# Altium PCB Relay.PcbDoc
Units mil, origin at the board's own origin, x right, y up, seen from the top; angles counter-clockwise.
Board outline 6702.94 x 3280.03 mil, 2 copper layers (Top Layer, Bottom Layer); 131 components, 162 nets, 454 pads, 0 vias.
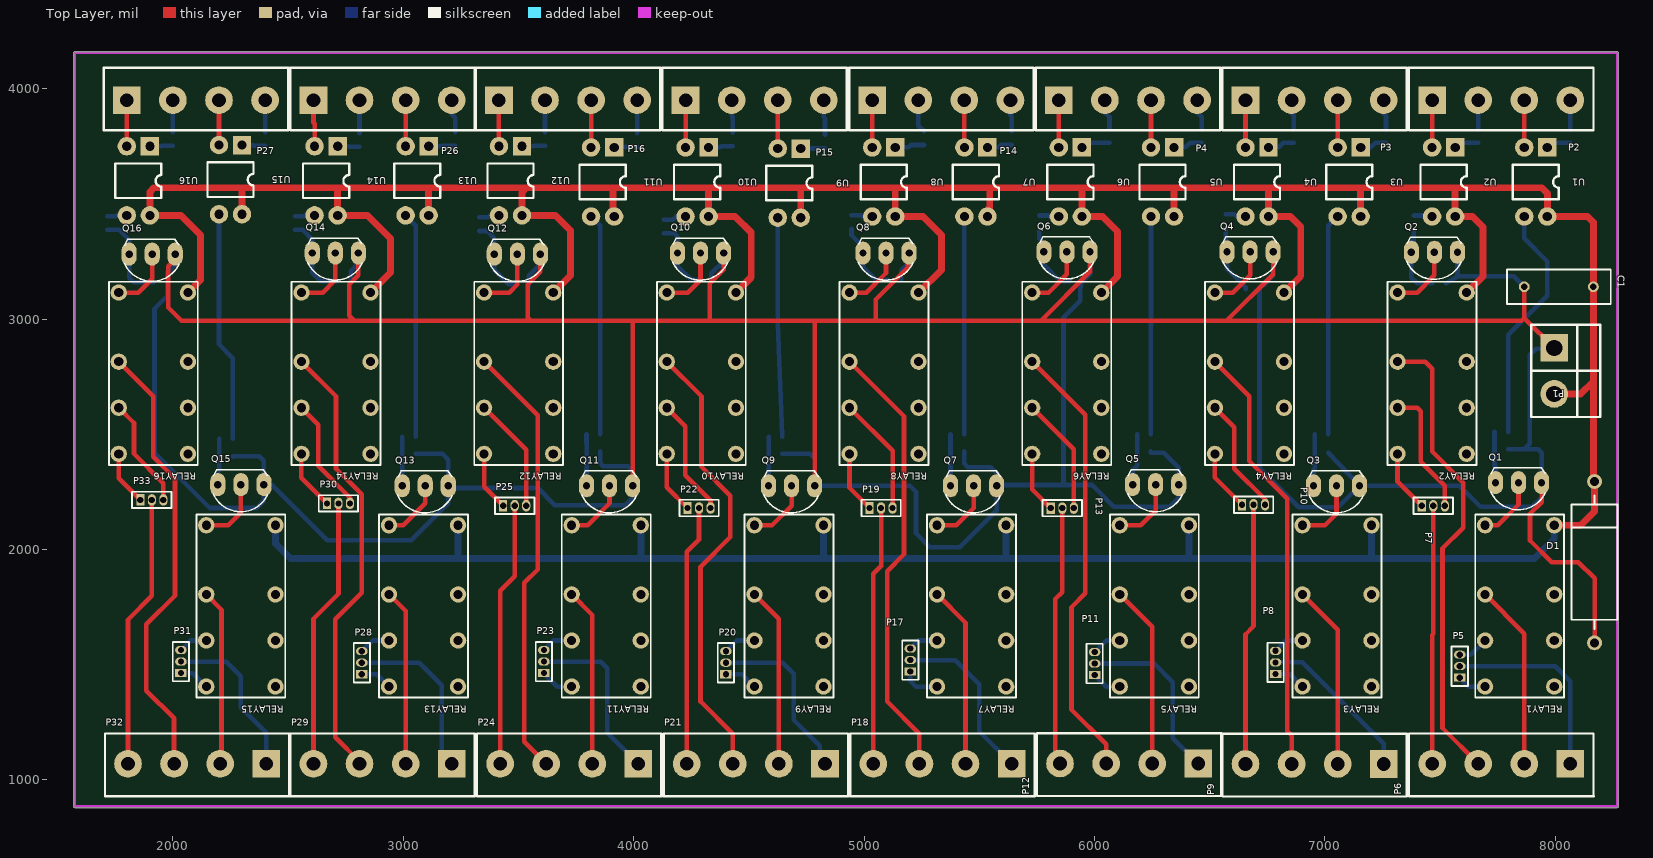
[diagram p0: Top Layer view]
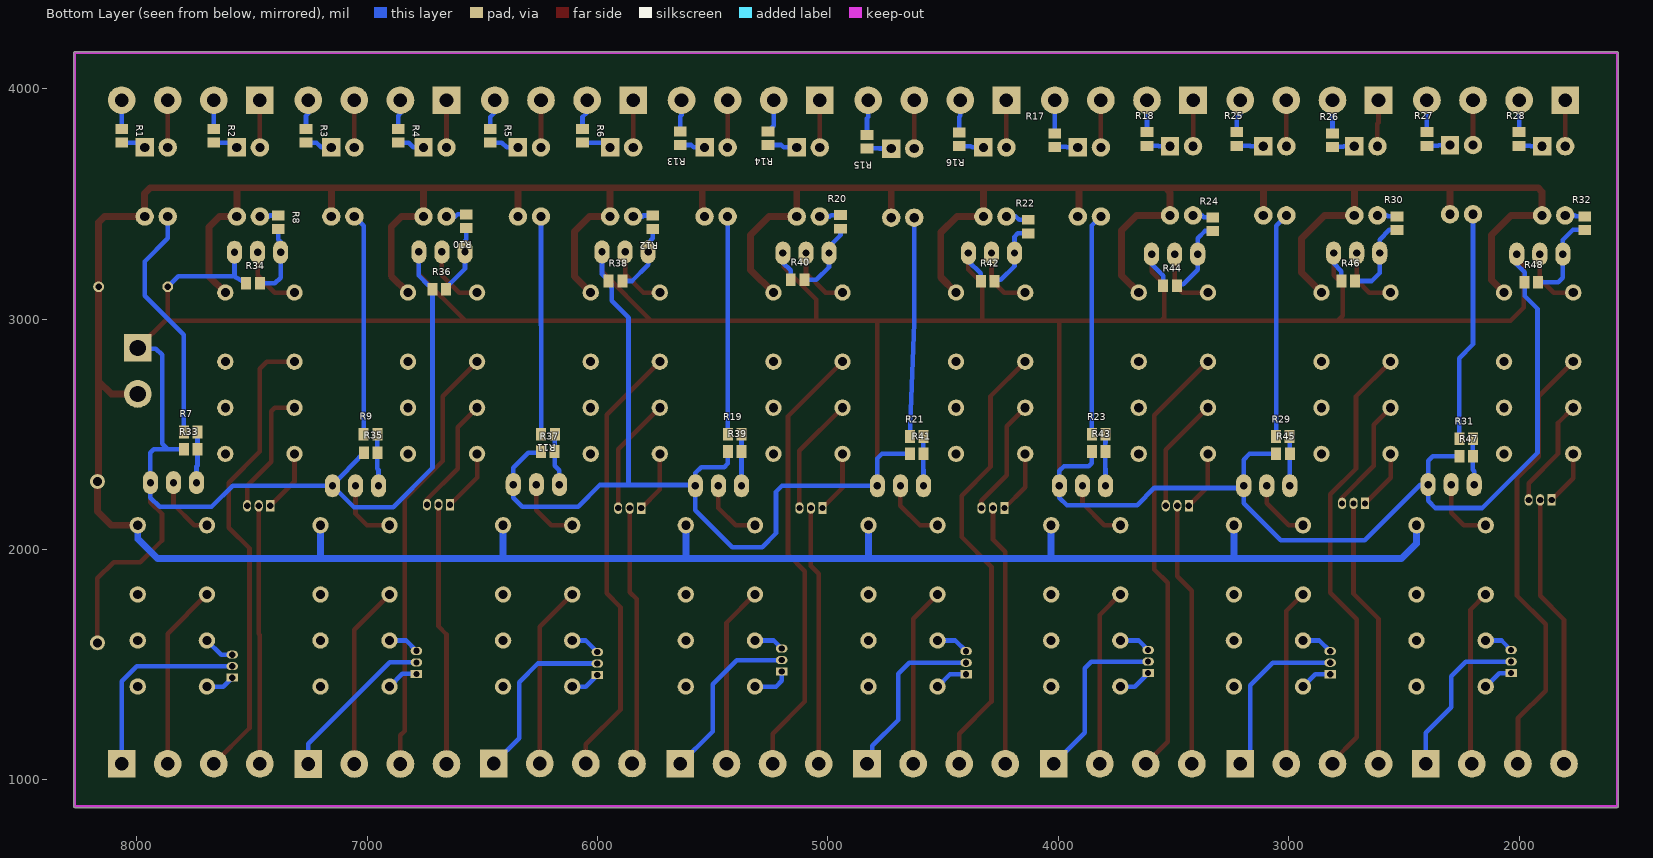
[diagram p1: Bottom Layer view, seen from below]

## Layer stack, top to bottom
Top Solder: solder mask 0.4, Solder Resist, Dk 3.5
Top Layer: signal copper 1.4
Dielectric 1: dielectric 12.6, FR-4, Dk 4.8
Bottom Layer: signal copper 1.4
Bottom Solder: solder mask 0.4, Solder Resist, Dk 3.5

## Board outline
1569.92,886.14 cw(c1574.8,887.28) 1569.79,887.28 1569.79,4155 cw(c1574.8,4155) 1574.8,4160.02 8267.72,4160.02 cw(c8267.72,4155) 8272.73,4155 8272.73,887.28 cw(c8267.72,887.28) 8272.6,886.14 cw(c8267.72,885) 8272.73,885 cw(c8267.72,885) 8267.72,879.99 1574.8,879.99 cw(c1574.8,885)

## Design rules (kind name [scope] priority, off if disabled: settings)
Clearance [All] p1: gap=15 ignorepadtopadclearanceinfootprint=FALSE
PolygonConnect [All] p1: connectstyle=Relief reliefconductorwidth=10 reliefentries=4 polygonreliefangle="90 Angle" airgapwidth=10
RoutingVias [All] p1: holewidth=28 width=50 viastyle="Through Hole" minholewidth=28 minwidth=50 maxholewidth=28 maxwidth=50
SolderMaskExpansion [All] p1: expansion=4
Width [All] p1: maxlimit=50 minlimit=10 preferedwidth=20
30 further rules are at their usual default settings.

## Components (designator, comment, footprint, x,y, rotation, side; value= is the part's Value field where it differs from the comment)
C1 "Cap" RAD-0.3 8015,3140 r0 top value=100pF
D1 "D Zener" DIODE-0.7 8170,1945 r90 top
P1 "Header 2" CON2 7995,2875 r270 top
P2 "Header 4" CON4 7465,3950 r0 top
P3 "Header 4" CON4 6655,3950 r0 top
P4 "Header 4" CON4 5845,3950 r0 top
P5 "MHDR1X3" MHDR1X3 7585,1443.5 r90 top
P6 "Header 4" CON4 8065,1070 r180 top
P7 "MHDR1X3" MHDR1X3 7420,2189.5 r0 top
P8 "MHDR1X3" MHDR1X3 6785.63,1460 r90 top
P9 "Header 4" CON4 7255,1069 r180 top
P10 "MHDR1X3" MHDR1X3 6640,2194.37 r0 top
P11 "MHDR1X3" MHDR1X3 6000.5,1455 r90 top
P12 "Header 4" CON4 6450,1071 r180 top
P13 "MHDR1X3" MHDR1X3 5810,2179.5 r0 top
P14 "Header 4" CON4 5035,3950 r0 top
P15 "Header 4" CON4 4225,3950 r0 top
P16 "Header 4" CON4 3415,3950 r0 top
P17 "MHDR1X3" MHDR1X3 5200.5,1470 r90 top
P18 "Header 4" CON4 5640,1070 r180 top
P19 "MHDR1X3" MHDR1X3 5023.5,2180 r0 top
P20 "MHDR1X3" MHDR1X3 4400,1458.5 r90 top
P21 "Header 4" CON4 4830,1070 r180 top
P22 "MHDR1X3" MHDR1X3 4233.5,2180 r0 top
P23 "MHDR1X3" MHDR1X3 3610,1463.5 r90 top
P24 "Header 4" CON4 4020,1070 r180 top
P25 "MHDR1X3" MHDR1X3 3433.5,2190 r0 top
P26 "Header 4" CON4 2610,3950 r0 top
P27 "Header 4" CON4 1800,3950 r0 top
P28 "MHDR1X3" MHDR1X3 2820,1458.5 r90 top
P29 "Header 4" CON4 3210,1070 r180 top
P30 "MHDR1X3" MHDR1X3 2668.5,2200 r0 top
P31 "MHDR1X3" MHDR1X3 2035,1463.5 r90 top
P32 "Header 4" CON4 2405,1070 r180 top
P33 "MHDR1X3" MHDR1X3 1858.5,2215 r0 top
Q1 "2N3904" QTO-92 7840,2290 r180 top
Q2 "2N3904" QTO-92 7475,3290 r180 top
Q3 "2N3904" QTO-92 7050,2276.5 r180 top
Q4 "2N3904" QTO-92 6675,3291.5 r180 top
Q5 "2N3904" QTO-92 6265,2281.5 r180 top
Q6 "2N3904" QTO-92 5880,3291.5 r180 top
Q7 "2N3904" QTO-92 5475,2276.5 r180 top
Q8 "2N3904" QTO-92 5095,3286.5 r180 top
Q9 "2N3904" QTO-92 4685,2276.5 r180 top
Q10 "2N3904" QTO-92 4290,3286.5 r180 top
Q11 "2N3904" QTO-92 3895,2276.5 r180 top
Q12 "2N3904" QTO-92 3495,3281.5 r180 top
Q13 "2N3904" QTO-92 3095,2276.5 r180 top
Q14 "2N3904" QTO-92 2705,3286.5 r180 top
Q15 "2N3904" QTO-92 2295,2281.5 r180 top
Q16 "2N3904" QTO-92 1910,3281.5 r180 top
R1 "Res3" C0805 8065,3795 r270 bottom value=1K
R2 "Res3" C0805 7665,3795 r270 bottom value=1K
R3 "Res3" C0805 7265,3795 r270 bottom value=1K
R4 "Res3" C0805 6865,3795 r270 bottom value=1K
R5 "Res3" C0805 6465,3795 r270 bottom value=1K
R6 "Res3" C0805 6065,3795 r270 bottom value=1K
R7 "Res3" C0805 7765.47,2510 r180 bottom value=1K
R8 "Res3" C0805 7385,3420 r270 bottom value=1K
R9 "Res3" C0805 6985,2500 r180 bottom value=1K
R10 "Res3" C0805 6570,3425 r270 bottom value=1K
R11 "Res3" C0805 6214.53,2500 r180 bottom value=1K
R12 "Res3" C0805 5760,3420 r270 bottom value=1K
R13 "Res3" C0805 5640,3785 r270 bottom value=1K
R14 "Res3" C0805 5260,3785 r270 bottom value=1K
R15 "Res3" C0805 4830,3770 r270 bottom value=1K
R16 "Res3" C0805 4430,3780 r270 bottom value=1K
R17 "Res3" C0805 4015,3776.5 r270 bottom value=1K
R18 "Res3" C0805 3615,3781.5 r270 bottom value=1K
R19 "Res3" C0805 5404.53,2500 r180 bottom value=1K
R20 "Res3" C0805 4945,3421.5 r270 bottom value=1K
R21 "Res3" C0805 4615,2490 r180 bottom value=1K
R22 "Res3" C0805 4130,3401.5 r270 bottom value=1K
R23 "Res3" C0805 3824.53,2500 r180 bottom value=1K
R24 "Res3" C0805 3330,3411.5 r270 bottom value=1K
R25 "Res3" C0805 3225,3781.5 r270 bottom value=1K
R26 "Res3" C0805 2810,3776.5 r270 bottom value=1K
R27 "Res3" C0805 2400,3781.5 r270 bottom value=1K
R28 "Res3" C0805 2000,3781.5 r270 bottom value=1K
R29 "Res3" C0805 3025,2490 r180 bottom value=1K
R30 "Res3" C0805 2530,3416.5 r270 bottom value=1K
R31 "Res3" C0805 2230,2480 r180 bottom value=1K
R32 "Res3" C0805 1715,3416.5 r270 bottom value=1K
R33 "Res3" C0805 7765.47,2435 r180 bottom value=1K
R34 "Res3" C0805 7495,3155 r180 bottom value=1K
R35 "Res3" C0805 6984.53,2420 r180 bottom value=1K
R36 "Res3" C0805 6686.5,3130 r180 bottom value=1K
R37 "Res3" C0805 6215,2425 r180 bottom value=1K
R38 "Res3" C0805 5921.5,3165 r180 bottom value=1K
R39 "Res3" C0805 5404.53,2425 r180 bottom value=1K
R40 "Res3" C0805 5131.5,3170 r180 bottom value=1K
R41 "Res3" C0805 4615,2415 r180 bottom value=1K
R42 "Res3" C0805 4306.72,3164.43 r180 bottom value=1K
R43 "Res3" C0805 3825,2425 r180 bottom value=1K
R44 "Res3" C0805 3515,3145 r180 bottom value=1K
R45 "Res3" C0805 3024.53,2415 r180 bottom value=1K
R46 "Res3" C0805 2741.5,3165 r180 bottom value=1K
R47 "Res3" C0805 2230,2405 r180 bottom value=1K
R48 "Res3" C0805 1946.5,3160 r180 bottom value=1K
RELAY1 "RY12W-K" RY-Series 7695,2105 r270 top
RELAY2 "RY12W-K" RY-Series 7315,3115 r270 top
RELAY3 "RY12W-K" RY-Series 6902.14,2105 r270 top
RELAY4 "RY12W-K" RY-Series 6522.14,3115 r270 top
RELAY5 "RY12W-K" RY-Series 6109.29,2105 r270 top
RELAY6 "RY12W-K" RY-Series 5729.29,3115 r270 top
RELAY7 "RY12W-K" RY-Series 5316.43,2105 r270 top
RELAY8 "RY12W-K" RY-Series 4936.43,3115 r270 top
RELAY9 "RY12W-K" RY-Series 4523.57,2105 r270 top
RELAY10 "RY12W-K" RY-Series 4143.57,3115 r270 top
RELAY11 "RY12W-K" RY-Series 3730.71,2105 r270 top
RELAY12 "RY12W-K" RY-Series 3350.71,3115 r270 top
RELAY13 "RY12W-K" RY-Series 2937.86,2105 r270 top
RELAY14 "RY12W-K" RY-Series 2557.86,3115 r270 top
RELAY15 "RY12W-K" RY-Series 2145,2105 r270 top
RELAY16 "RY12W-K" RY-Series 1765,3115 r270 top
U1 "OPTO" DIP4 7965,3745 r270 top value=PC817
U2 "OPTO" DIP4 7565,3745 r270 top value=PC817
U3 "OPTO" DIP4 7155,3745 r270 top value=PC817
U4 "OPTO" DIP4 6755,3745 r270 top value=PC817
U5 "OPTO" DIP4 6345,3745 r270 top value=PC817
U6 "OPTO" DIP4 5945,3745 r270 top value=PC817
U7 "OPTO" DIP4 5535,3745 r270 top value=PC817
U8 "OPTO" DIP4 5135,3745 r270 top value=PC817
U9 "OPTO" DIP4 4725,3740 r270 top value=PC817
U10 "OPTO" DIP4 4325,3745 r270 top value=PC817
U11 "OPTO" DIP4 3915,3745 r270 top value=PC817
U12 "OPTO" DIP4 3515,3750 r270 top value=PC817
U13 "OPTO" DIP4 3110,3750 r270 top value=PC817
U14 "OPTO" DIP4 2715,3750 r270 top value=PC817
U15 "OPTO" DIP4 2300,3755 r270 top value=PC817
U16 "OPTO" DIP4 1900,3750 r270 top value=PC817

## Footprints (in the part's own frame and the unit in brackets; to place one, negate y for a bottom-side part, rotate by r counter-clockwise, add the part's x,y. Pads: shape width x height; smd on the part's side, far side on the other; paste and mask are expansions set on the pad)
C0805 [mm] "Chip Capacitor, Body 2.0x1.3mm, IPC High Density"
  rect 1.1x1.4 smd: 1(-0.75,0) 2(0.75,0)
  body extent -1.1,-0.72 1.1,0.72, height 1.4
CON2 [mil]
  rect 120x120 hole 70: 1(0,0)
  round 120 hole 70: 2(200,0)
  silkscreen extent -100,-100 300,200
CON4 [mil] "CON4 5.08"
  rect 120x120 hole 59.06: 1(0,0)
  round 120 hole 59.06: 2(200,0) 3(400,0) 4(600,0)
  silkscreen extent -101,-131 700,141
DIODE-0.7 [mm] "Diode, Thru-Hole; 2 Leads; 0.7 in Pin Spacing"
  round 1.65 hole 1: 1(-8.89,0) 2(8.89,0)
  silkscreen extent -7.37,-2.54 7.37,2.54
DIP4 [mil]
  rect 80x80 hole 40: 1(0,0)
  round 80 hole 40: 2(0,-100) 3(300,-100) 4(300,0)
  silkscreen extent 75,-150 225,50
MHDR1X3 [mil] "Connector; Header; 3 Position"
  rect 35x50 hole 27: 1(0,0)
  oval 35x50 hole 27: 2(50,0) 3(100,0)
  silkscreen extent -35,-35 135,35
QTO-92 [mil] "TO-92"
  oval 66x100 hole 32: 1(-100,0) 2(0,0) 3(100,0)
  silkscreen extent -117,-65 120,118, body extent -109,-66 109,95, height 245
RAD-0.3 [mm] "Radial Cap, Thru-Hole; 2 Leads; 0.3 in Pin Spacing"
  round 1.2 hole 0.7: 1(-3.81,0) 2(3.81,0)
  silkscreen extent -5.71,-1.91 5.71,1.91
RY-Series [mm]
  round 1.8 hole 1: 1(0,0) 2(7.62,0) 3(12.7,0) 4(17.78,0) 5(17.78,7.62) 6(12.7,7.62) 7(7.62,7.62) 8(0,7.62)
  silkscreen extent -1.2,-1.09 19,8.71, body extent -1.16,-1.04 19.06,8.76, height 12.5

## Part data
C1: "Capacitor", LatestRevisionDate=17-Jul-2002, LatestRevisionNote="Re-released for DXP Platform.", PackageDescription="Radial Cap, Thru-Hole; 2 Leads; 0.3 in Pin Spacing", PackageReference=RAD-0.3, Published=8-Jun-2000, Publisher="Altium Limited"
D1: "Zener Diode", LatestRevisionDate=17-Jul-2002, LatestRevisionNote="Re-released for DXP Platform.", PackageDescription="Diode, Thru-Hole; 2 Leads; 0.7 in Pin Spacing", PackageReference=DIODE-0.7, Published=8-Jun-2000, Publisher="Altium Limited"
P1: "Header, 2-Pin", LatestRevisionDate=17-Jul-2002, LatestRevisionNote="Re-released for DXP Platform.", Publisher="Altium Limited"
P2 P3 P4 P6 P9 P12 P14 P15 P16 P18 P21 P24 P26 P27 P29 P32: "Header, 4-Pin", LatestRevisionDate=17-Jul-2002, LatestRevisionNote="Re-released for DXP Platform.", Publisher="Altium Limited"
P5 P7 P8 P10 P11 P13 P17 P19 P20 P22 P23 P25 P28 P30 P31 P33: "Header, 3-Pin", LatestRevisionDate=17-Jul-2002, LatestRevisionNote="Re-released for DXP Platform.", Publisher="Altium Limited"
Q1 Q2 Q3 Q4 Q5 Q6 Q7 Q8 Q9 Q10 Q11 Q12 Q13 Q14 Q15 Q16: "NPN General Purpose Amplifier", Code_JEDEC=TO-92A, ComponentLink1Description="Manufacturer Link", ComponentLink1URL=http://www.fairchildsemi.com/, ComponentLink2Description=Datasheet, ComponentLink2URL=http://www.fairchildsemi.com/ds/2N%2F2N3904.pdf, DatasheetVersion=1997, LatestRevisionDate=15-Jan-2003, LatestRevisionNote="PCB Footprint 'BCY-W3/D4.7' replaced", PackageReference=TO-92A, PackageVersion=Sep-1998, Published=8-Jun-2000, Publisher="Altium Limited"
R1 R2 R3 R4 R5 R6 R7 R8 R9 R10 R11 R12 R13 R14 R15 R16 R17 R18 R19 R20 R21 R22 R23 R24 R25 R26 R27 R28 R29 R30 R31 R32 R33 R34 R35 R36 R37 R38 R39 R40 R41 R42 R43 R44 R45 R46 R47 R48: "Resistor", LatestRevisionDate=29-May-2009, LatestRevisionNote="IPC-7351 Footprint Added.", PackageDescription="Chip Resistor", PackageReference=J1-0603, Published=8-Jun-2000, Publisher="Altium Limited"
U1 U2 U3 U4 U5 U6 U7 U8 U9 U10 U11 U12 U13 U14 U15 U16: library part OPTO_PC817

## Nets (pads, with @x,y where several pads share a name; then routed paths per layer and width w, separated by ;. In a path a pad name is that pad's centre, name@x,y a point inside that pad or via, vN(x,y) a via of type N, cw(c..) or ccw(c..) an arc to the next point about the centre after c; other vN are vias at no path point)
GND: C1.1 D1.1 P1.1 Q1.1 Q2.1 Q3.1 Q4.1 Q5.1 Q6.1 Q7.1 Q8.1 Q9.1 Q10.1 Q11.1 Q12.1 Q13.1 Q14.1 Q15.1 Q16.1 R33.1 R34.1 R35.1 R36.1 R37.1 R38.1 R39.1 R40.1 R41.1 R42.1 R43.1 R44.1 R45.1 R46.1 R47.1 R48.1 | length 23532.7
  Top Layer w20: Q16.1 2010,3259.78 1980,3229.78 1980,3050 2037.5,2992.5 2787.5,2992.5 ; Q14.1 2805,3190 2765,3150 2765,3015 2787.5,2992.5 ; Q12.1 3595,3205 3540,3150 3540,3005 3552.5,2992.5 ; Q11.1 3995,2990 ; Q10.1 4390,3215 4330,3155 4330,2992.5 ; Q9.1 4785,2985 ; Q8.1 5190.2,3281.7 5190.2,3225.2 5050,3085 5050,2992.5 ; Q6.1 5980,3205 5767.5,2992.5 ; Q4.1 6775,3195 6572.5,2992.5 ; C1.1 7865,3000 ; Q1.1 7940,2205 7890,2155 7890,2039 7984,1945 8100,1945 8170,1875 D1.1 ; P1.1 7870,3000 7865,3000 ; 2787.5,2992.5 3552.5,2992.5 ; 3552.5,2992.5 4330,2992.5 ; 4330,2992.5 5050,2992.5 ; 5050,2992.5 5767.5,2992.5 ; 5767.5,2992.5 6572.5,2992.5 ; 6572.5,2992.5 7852.5,2992.5 7860,3000 7865,3000
  Bottom Layer w20: Q16.1 2010,3236.97 1976.03,3203 R48.1 1976.03,3100 1920,3043.97 1920,2420 2160,2180 2363.28,2180 2395,2211.72 Q15.1 ; R47.1@2259.53,2402 R47.1 2375,2405 2395,2385 Q15.1 ; R46.1 2771.03,3208 2805,3241.97 Q14.1 ; R45.1 3170,2415 3195,2390 Q13.1 Q13.1@3195,2267 ; R44.1 3544.53,3188 3595,3238.47 Q12.1 ; R43.1 3854.53,2375 3867.53,2362 3975,2362 3995,2342 Q11.1 3995,2225 3962,2192 3658,2192 3583,2267 Q13.1@3195,2267 ; R42.1 4336.24,3198 4390,3251.76 Q10.1 ; R41.1 4765,2415 4785,2395 Q9.1 4785,2276 5199,2276 5225,2250 5225,2070 5285,2010 5415,2010 5575,2170 Q7.1 Q7.1@5575,2280 ; R40.1 5161.03,3211 5195,3244.97 Q8.1 ; R39.1 5434.06,2372.94 5450,2357 5550,2357 5575,2332 Q7.1@5575,2280 ; Q6.1 5980,3193.97 R38.1 5939.37,3153.35 5939.37,3136.47 5938.63,3135.73 5938.63,3078.97 5865,3005.35 5865,2280 ; R37.1 6244.53,2419 6300,2419 6365,2354 Q5.1 6365,2225 6326,2186 6084,2186 5990,2280 5865,2280 ; Q4.1 6775,3188.97 6733.59,3147.56 6727.68,3147.56 6716.03,3135.91 R36.1 6716.03,2353.97 6887,2183 7056.5,2183 Q3.1 Q3.1@7150,2277 ; R35.1 Q3.1@7150,2277 ; R34.1 7575,3185 ; Q2.1 7575,3185 ; R33.1 7865,2435 ; C1.1 7820,3185 7575,3185 ; P1.1 7991.72,2871.72 7916.72,2871.72 7889.3,2844.3 7889.3,2459.3 7865,2435 ; Q15.1 2428.5,2281.5 2670,2040 3035,2040 3195,2200 Q13.1@3195,2267 ; Q7.1@5575,2280 5865,2280 ; Q3.1@7150,2277 7583,2277 7675,2185 7900,2185 7940,2225 Q1.1 7940,2420 7925,2435 7865,2435
NetP2_1: P2.1 U2.2 | length 205
  Top Layer w20: U2.2 P2.1
NetP2_2: P2.2 R2.1 | length 125.5
  Bottom Layer w20: R2.1 P2.2
NetP2_3: P2.3 U1.2 | length 205
  Top Layer w20: U1.2 P2.3
NetP2_4: P2.4 R1.1 | length 125.5
  Bottom Layer w20: R1.1 P2.4
NetP3_1: P3.1 U4.2 | length 205
  Top Layer w20: U4.2 P3.1
NetP3_2: P3.2 R4.1 | length 129.6
  Bottom Layer w20: P3.2 6855,3892 6865,3882 R4.1
NetP3_3: P3.3 U3.2 | length 205
  Top Layer w20: U3.2 P3.3
NetP3_4: P3.4 R3.1 | length 129.6
  Bottom Layer w20: P3.4 7255,3892 7265,3882 R3.1
NetP4_1: P4.1 U6.2 | length 205
  Top Layer w20: U6.2 P4.1
NetP4_2: P4.2 R6.1 | length 133.8
  Bottom Layer w20: P4.2 6045,3897 6065,3877 R6.1
NetP4_3: P4.3 U5.2 | length 205
  Top Layer w20: U5.2 P4.3
NetP4_4: P4.4 R5.1 | length 133.8
  Bottom Layer w20: P4.4 6445,3897 6465,3877 R5.1
NetP5_1: P5.1 RELAY1.4 | length 125.9
  Bottom Layer w20: P5.1 7623.5,1405 RELAY1.4
NetP5_2: P5.2 P6.1 | length 865.4
  Bottom Layer w20: P5.2 8000,1493.5 8065,1428.5 P6.1
NetP5_3: P5.3 RELAY1.3 | length 135.5
  Bottom Layer w20: P5.3 7633.5,1543.5 RELAY1.3
NetP6_2: P6.2 RELAY1.2 | length 805.4
  Top Layer w20: RELAY1.2 7865,1635 P6.2
NetP6_3: P6.3 RELAY2.2 | length 2034.8
  Top Layer w20: RELAY2.2 7435,2815 7465,2785 7465,2425 7600,2290 7600,2095 7510,2005 7510,1225 P6.3
NetP6_4: P6.4 P7.2 | length 1121.6
  Top Layer w20: P6.4 7465,1629 7470,1634 P7.2
NetP7_1: P7.1 RELAY2.4 | length 269
  Top Layer w20: RELAY2.4 7315,2294.5 P7.1
NetP7_3: P7.3 RELAY2.3 | length 560.2
  Top Layer w20: RELAY2.3 7400,2615 7415,2600 7415,2381 7520,2276 P7.3
NetP8_1: P8.1 RELAY3.4 | length 139.3
  Bottom Layer w20: P8.1 6847.14,1460 RELAY3.4
NetP8_2: P8.2 P9.1 | length 703.6
  Bottom Layer w20: P8.2 6902,1510 7255,1157 P9.1
NetP8_3: P8.3 RELAY3.3 | length 135.2
  Bottom Layer w20: P8.3 6830.63,1605 RELAY3.3
NetP9_2: P9.2 RELAY3.2 | length 799.3
  Top Layer w20: RELAY3.2 7055,1652.14 P9.2
NetP9_3: P9.3 RELAY4.2 | length 1883.9
  Top Layer w20: RELAY4.2 6672,2665.14 6672,2384 6836,2220 6836,1212 6855,1193 P9.3
NetP9_4: P9.4 P10.2 | length 1139.9
  Top Layer w20: P9.4 6655,1631 6690,1666 P10.2
NetP10_1: P10.1 RELAY4.4 | length 269.4
  Top Layer w20: RELAY4.4 6522.14,2312.23 P10.1
NetP10_3: P10.3 RELAY4.3 | length 510.9
  Top Layer w20: RELAY4.3 6607,2530.14 6607,2350 6740,2217 P10.3
NetP11_1: P11.1 RELAY5.4 | length 129.5
  Bottom Layer w20: P11.1 6050.5,1405 RELAY5.4
NetP11_2: P11.2 P12.1 | length 771.6
  Bottom Layer w20: P11.2 6259,1505 6340,1424 6340,1181 P12.1
NetP11_3: P11.3 RELAY5.3 | length 129.5
  Bottom Layer w20: P11.3 6050.5,1605 RELAY5.3
NetP12_2: P12.2 RELAY5.2 | length 792.3
  Top Layer w20: RELAY5.2 6250,1664.29 P12.2
NetP12_3: P12.3 RELAY6.2 | length 1926.3
  Top Layer w20: RELAY6.2 5959.69,2584.6 5959.69,1809.69 5900,1750 5900,1305 6050,1155 P12.3
NetP12_4: P12.4 P13.2 | length 1129.2
  Top Layer w20: P12.4 5830,1091 5830,1785 5860,1815 P13.2
NetP13_1: P13.1 RELAY6.4 | length 268.9
  Top Layer w20: RELAY6.4 5729.29,2260.21 P13.1
NetP13_3: P13.3 RELAY6.3 | length 510.4
  Top Layer w20: RELAY6.3 5910,2434.29 P13.3
NetP14_1: P14.1 U8.2 | length 205
  Top Layer w20: U8.2 P14.1
NetP14_2: P14.2 R14.1 | length 145.8
  Bottom Layer w20: P14.2 5235,3839.53 R14.1
NetP14_3: P14.3 U7.2 | length 205
  Top Layer w20: U7.2 P14.3
NetP14_4: P14.4 R13.1 | length 137.5
  Bottom Layer w20: P14.4 5635,3884 5640,3879 R13.1
NetP15_1: P15.1 U10.2 | length 205
  Top Layer w20: U10.2 P15.1
NetP15_2: P15.2 R16.1 | length 142.5
  Bottom Layer w20: P15.2 4425,3882 4430,3877 R16.1
NetP15_3: P15.3 U9.2 | length 210
  Top Layer w20: U9.2 P15.3
NetP15_4: P15.4 R15.1 | length 152.5
  Bottom Layer w20: P15.4 4825,3877 4830,3872 R15.1
NetP16_1: P16.1 U12.2 | length 200
  Top Layer w20: U12.2 P16.1
NetP16_2: P16.2 R18.1 | length 139
  Bottom Layer w20: R18.1 P16.2
NetP16_3: P16.3 U11.2 | length 205
  Top Layer w20: U11.2 P16.3
NetP16_4: P16.4 R17.1 | length 144
  Bottom Layer w20: R17.1 P16.4
NetP17_1: P17.1 RELAY7.4 | length 166.6
  Bottom Layer w20: P17.1 5200.5,1429.5 5225,1405 RELAY7.4
NetP17_2: P17.2 P18.1 | length 746
  Bottom Layer w20: P17.2 5395,1520 5500,1415 5500,1210 P18.1
NetP17_3: P17.3 RELAY7.3 | length 130.4
  Bottom Layer w20: P17.3 5235.5,1605 RELAY7.3
NetP18_2: P18.2 RELAY7.2 | length 786.2
  Top Layer w20: RELAY7.2 5440,1681.43 P18.2
NetP18_3: P18.3 RELAY8.2 | length 1931.4
  Top Layer w20: RELAY8.2 5173.19,2578.24 5173.19,1978.69 5100,1905.5 5100,1340 5240,1200 P18.3
NetP18_4: P18.4 P19.2 | length 1123.9
  Top Layer w20: P18.4 5040,1895 5073.5,1928.5 P19.2
NetP19_1: P19.1 RELAY8.4 | length 271.1
  Top Layer w20: RELAY8.4 4936.43,2267.07 P19.1
NetP19_3: P19.3 RELAY8.3 | length 512.5
  Top Layer w20: RELAY8.3 5123.5,2427.93 P19.3
NetP20_1: P20.1 RELAY9.4 | length 145.7
  Bottom Layer w20: P20.1 4470.07,1458.5 RELAY9.4
NetP20_2: P20.2 P21.1 | length 761
  Bottom Layer w20: P20.2 4646.5,1508.5 4695,1460 4695,1260 4806.72,1148.28 4806.72,1093.28 P21.1
NetP20_3: P20.3 RELAY9.3 | length 142.8
  Bottom Layer w20: P20.3 4446.5,1605 RELAY9.3
NetP21_2: P21.2 RELAY9.2 | length 779.1
  Top Layer w20: RELAY9.2 4630,1698.57 P21.2
NetP21_3: P21.3 RELAY10.2 | length 1970.5
  Top Layer w20: RELAY10.2 4294,2664.57 4294,2358.87 4418.94,2233.94 4418.94,2053.94 4290,1925 4290,1340 4430,1200 P21.3
NetP21_4: P21.4 P22.2 | length 1132.2
  Top Layer w20: P21.4 4230,1990 4283.5,2043.5 P22.2
NetP22_1: P22.1 RELAY10.4 | length 272.2
  Top Layer w20: RELAY10.4 4143.57,2269.93 P22.1
NetP22_3: P22.3 RELAY10.3 | length 513.7
  Top Layer w20: RELAY10.3 4223,2535.57 4223,2322.69 4333.5,2212.19 P22.3
NetP23_1: P23.1 RELAY11.4 | length 144.9
  Bottom Layer w20: P23.1 3668.5,1405 RELAY11.4
NetP23_2: P23.2 P24.1 | length 762.7
  Bottom Layer w20: P23.2 3856.5,1513.5 3885,1485 3885,1205 P24.1 P24.1@4025,1070
NetP23_3: P23.3 RELAY11.3 | length 137.9
  Bottom Layer w20: P23.3 3651.5,1605 RELAY11.3
NetP24_2: P24.2 RELAY11.2 | length 772
  Top Layer w20: RELAY11.2 3820,1715.71 P24.2
NetP24_3: P24.3 RELAY12.2 | length 1904.7
  Top Layer w20: RELAY12.2 3583.19,2582.53 3583.19,1913.19 3525,1855 3525,1165 P24.3
NetP24_4: P24.4 P25.2 | length 1146.3
  Top Layer w20: P24.4 3420,1820 3483.5,1883.5 P25.2
NetP25_1: P25.1 RELAY12.4 | length 259.3
  Top Layer w20: RELAY12.4 3350.71,2272.79 P25.1
NetP25_3: P25.3 RELAY12.3 | length 500.7
  Top Layer w20: RELAY12.3 3533.5,2432.21 P25.3
NetP26_1: P26.1 U14.2 | length 202.1
  Top Layer w20: P26.1 2610,3852 2615,3847 U14.2
NetP26_2: P26.2 R26.1 | length 144
  Bottom Layer w20: R26.1 P26.2
NetP26_3: P26.3 U13.2 | length 200
  Top Layer w20: U13.2 P26.3
NetP26_4: P26.4 R25.1 | length 145.2
  Bottom Layer w20: P26.4 3210,3888 3225,3873 R25.1
NetP27_1: P27.1 U16.2 | length 200
  Top Layer w20: U16.2 P27.1
NetP27_2: P27.2 R28.1 | length 139
  Bottom Layer w20: R28.1 P27.2
NetP27_3: P27.3 U15.2 | length 195
  Top Layer w20: U15.2 P27.3
NetP27_4: P27.4 R27.1 | length 139
  Bottom Layer w20: R27.1 P27.4
NetP28_1: P28.1 RELAY13.4 | length 140
  Bottom Layer w20: P28.1 2884.36,1458.5 RELAY13.4
NetP28_2: P28.2 P29.1 | length 745.9
  Bottom Layer w20: P28.2 3069,1508.5 3167,1410.5 3167,1113 P29.1
NetP28_3: P28.3 RELAY13.3 | length 137.1
  Bottom Layer w20: P28.3 2866.5,1605 RELAY13.3
NetP29_2: P29.2 RELAY13.2 | length 764.9
  Top Layer w20: RELAY13.2 3010,1732.86 P29.2
NetP29_3: P29.3 RELAY14.2 | length 1943.9
  Top Layer w20: RELAY14.2 2708,2664.86 2708,2350 2819,2239 2819,1812 2705,1698 2705,1185 2810,1080 P29.3
NetP29_4: P29.4 P30.2 | length 1174.9
  Top Layer w20: P29.4 2610,1700 2718.5,1808.5 P30.2
NetP30_1: P30.1 RELAY14.4 | length 260.8
  Top Layer w20: RELAY14.4 2557.86,2310.64 P30.1
NetP30_3: P30.3 RELAY14.3 | length 502.3
  Top Layer w20: RELAY14.3 2631,2541.86 2631,2362.5 2768.5,2225 P30.3
NetP31_1: P31.1 RELAY15.4 | length 134.2
  Bottom Layer w20: P31.1 2086.5,1463.5 RELAY15.4
NetP31_2: P31.2 P32.1 | length 711.9
  Bottom Layer w20: P31.2 2231.5,1513.5 2295,1450 2295,1315 2405,1205 P32.1
NetP31_3: P31.3 RELAY15.3 | length 127.2
  Bottom Layer w20: P31.3 2076.5,1605 RELAY15.3
NetP32_2: P32.2 RELAY15.2 | length 764.8
  Top Layer w20: RELAY15.2 2211,1739 2211,1076 P32.2
NetP32_3: P32.3 RELAY16.2 | length 1947.1
  Top Layer w20: RELAY16.2 1915,2665 1915,2402 2009,2308 2009,1799 1885,1675 1885,1387 2005,1267 P32.3
NetP32_4: P32.4 P33.2 | length 1187.9
  Top Layer w20: P32.4 1805,1695 1908.5,1798.5 P33.2
NetP33_1: P33.1 RELAY16.4 | length 238.7
  Top Layer w20: RELAY16.4 1765,2308.5 P33.1
NetP33_3: P33.3 RELAY16.3 | length 480.2
  Top Layer w20: RELAY16.3 1831,2549 1831,2415 1958.5,2287.5 P33.3
NetQ1_2: Q1.2 RELAY1.1 | length 277.3
  Top Layer w20: RELAY1.1 7750,2105 7840,2195 Q1.2
NetQ1_3: Q1.3 R7.2 R33.2 | length 221.7
  Bottom Layer w20: R7.2 R33.2 7735.94,2364.06 7740,2360 Q1.3
NetQ2_2: Q2.2 RELAY2.1 | length 291.1
  Top Layer w20: RELAY2.1 7400,3115 7475,3190 Q2.2
NetQ2_3: Q2.3 R8.2 R34.2 | length 315.4
  Bottom Layer w20: R8.2 7385,3345 7375,3335 Q2.3 7375,3180 7400,3155 R34.2
NetQ3_2: Q3.2 RELAY3.1 | length 290.1
  Top Layer w20: RELAY3.1 7000,2105 7050,2155 Q3.2
NetQ3_3: Q3.3 R9.2 R35.2 | length 225.8
  Bottom Layer w20: Q3.3 6950,2345 6955,2350 R35.2 6955,2459 6955.47,2459.47 R9.2
NetQ4_2: Q4.2 RELAY4.1 | length 285.4
  Top Layer w20: RELAY4.1 6600,3115 6675,3190 Q4.2
NetQ4_3: Q4.3 R10.2 R36.2 | length 301.5
  Bottom Layer w20: R10.2 6570,3345 6575,3340 Q4.3 6575,3219 6656.97,3137.03 R36.2
NetQ5_2: Q5.2 RELAY5.1 | length 294.1
  Top Layer w20: RELAY5.1 6200,2105 6265,2170 Q5.2
NetQ5_3: Q5.3 R11.2 R37.2 | length 227.2
  Bottom Layer w20: Q5.3 6165,2343 6185.47,2363.47 R37.2 6185.47,2462 6185,2462.47 R11.2
NetQ6_2: Q6.2 RELAY6.1 | length 280.4
  Top Layer w20: RELAY6.1 5800,3115 5880,3195 Q6.2
NetQ6_3: Q6.3 R12.2 R38.2 | length 304.7
  Bottom Layer w20: R12.2 5760,3350 5780,3330 Q6.3 5780,3235 5850,3165 R38.2
NetQ7_2: Q7.2 RELAY7.1 | length 286.1
  Top Layer w20: RELAY7.1 5400,2105 5475,2180 Q7.2
NetQ7_3: Q7.3 R19.2 R39.2 | length 223.5
  Bottom Layer w20: Q7.3 R39.2 R19.2
NetQ8_2: Q8.2 RELAY8.1 | length 280.3
  Top Layer w20: RELAY8.1 5010,3115 5095,3200 Q8.2
NetQ8_3: Q8.3 R20.2 R40.2 | length 317.4
  Bottom Layer w20: R20.2 4945,3364 4995,3314 Q8.3 4995,3225 5050,3170 R40.2
NetQ9_2: Q9.2 RELAY9.1 | length 283.1
  Top Layer w20: RELAY9.1 4600,2105 4685,2190 Q9.2
NetQ9_3: Q9.3 R21.2 R41.2 | length 213.7
  Bottom Layer w20: Q9.3 4585,2345 4585.47,2345.47 R41.2 R21.2
NetQ10_2: Q10.2 RELAY10.1 | length 289.2
  Top Layer w20: RELAY10.1 4235,3115 4290,3170 Q10.2 Q10.2@4290,3290
NetQ10_3: Q10.3 R22.2 R42.2 | length 310.8
  Bottom Layer w20: R22.2 4175,3371.97 4190,3356.97 Q10.3 4190,3230 4250,3170 4277.19,3170 R42.2
NetQ11_2: Q11.2 RELAY11.1 | length 280.1
  Top Layer w20: RELAY11.1 3800,2105 3895,2200 Q11.2
NetQ11_3: Q11.3 R23.2 R43.2 | length 223.9
  Bottom Layer w20: Q11.3 3795,2350 3795.47,2350.47 R43.2 3795.47,2462 3795,2462.47 R23.2
NetQ12_2: Q12.2 RELAY12.1 | length 290.3
  Top Layer w20: RELAY12.1 3460,3115 3495,3150 Q12.2
NetQ12_3: Q12.3 R24.2 R44.2 | length 336.8
  Bottom Layer w20: R24.2 3363.03,3381.97 3395,3350 Q12.3 3395,3214 3458,3151 3485.47,3151 R44.2
NetQ13_2: Q13.2 RELAY13.1 | length 273
  Top Layer w20: RELAY13.1 3000,2105 3095,2200 Q13.2
NetQ13_3: Q13.3 R29.2 R45.2 | length 213.7
  Bottom Layer w20: Q13.3 R45.2 2995,2452 2995.47,2452.47 R29.2
NetQ14_2: Q14.2 RELAY14.1 | length 289.3
  Top Layer w20: RELAY14.1@2555,3115 RELAY14.1 2650,3115 2705,3170 Q14.2
NetQ14_3: Q14.3 R30.2 R46.2 | length 358.9
  Bottom Layer w20: R30.2 2563.03,3386.97 2605,3345 Q14.3 2605,3200 2640,3165 R46.2
NetQ15_2: Q15.2 RELAY15.1 | length 294.3
  Top Layer w20: RELAY15.1 2240,2105 2295,2160 Q15.2
NetQ15_3: Q15.3 R31.2 R47.2 | length 200.8
  Bottom Layer w20: Q15.3 2195,2340 2200.47,2345.47 R47.2 R31.2
NetQ16_2: Q16.2 RELAY16.1 | length 276.4
  Top Layer w20: RELAY16.1 1850,3115 1910,3175 Q16.2
NetQ16_3: Q16.3 R32.2 R48.2 | length 391.5
  Bottom Layer w20: R32.2 1766.03,3386.97 1810,3343 Q16.3 1810,3180 1830,3160 R48.2
NetR1_2: R1.2 U1.1 | length 108.5
  Bottom Layer w20: U1.1 7985.47,3765.47 R1.2
NetR2_2: R2.2 U2.1 | length 108.5
  Bottom Layer w20: U2.1 7585.47,3765.47 R2.2
NetR3_2: R3.2 U3.1 | length 118.5
  Bottom Layer w20: U3.1 7199,3745 7219.47,3765.47 R3.2
NetR4_2: R4.2 U4.1 | length 118.5
  Bottom Layer w20: U4.1 6799,3745 6819.47,3765.47 R4.2
NetR5_2: R5.2 U5.1 | length 128.5
  Bottom Layer w20: U5.1 6394,3745 6414.47,3765.47 R5.2
NetR6_2: R6.2 U6.1 | length 128.5
  Bottom Layer w20: U6.1 5965.47,3765.47 R6.2
NetR7_1: R7.1 U1.3 | length 1046.8
  Bottom Layer w20: R7.1 7795,2932 7965,3102 7965,3250 7865,3350 U1.3
NetR8_1: R8.1 U2.3 | length 81.9
  Bottom Layer w20: R8.1 7422,3449.53 7426.53,3445 U2.3
NetR9_1: R9.1 U3.3 | length 961.8
  Bottom Layer w20: R9.1 7014.53,3404.53 U3.3
NetR10_1: R10.1 U4.3 | length 88.9
  Bottom Layer w20: R10.1 6607,3454.53 6616.53,3445 U4.3
NetR11_1: R11.1 U5.3 | length 945.4
  Bottom Layer w20: R11.1 6244.06,2972 6245,2972.94 U5.3
NetR12_1: R12.1 U6.3 | length 86.9
  Bottom Layer w20: R12.1 5800,3449.53 5804.53,3445 U6.3
NetR13_2: R13.2 U7.1 | length 109.3
  Bottom Layer w20: U7.1 5582,3745 5592.47,3755.47 R13.2
NetR14_2: R14.2 U8.1 | length 129.3
  Bottom Layer w20: U8.1 5192,3745 5202.47,3755.47 R14.2
NetR15_2: R15.2 U9.1 | length 105.2
  Bottom Layer w20: U9.1 4777,3740 4777.47,3740.47 R15.2
NetR16_2: R16.2 U10.1 | length 107.3
  Bottom Layer w20: U10.1 4374,3745 4379.47,3750.47 R16.2
NetR17_2: R17.2 U11.1 | length 100.8
  Bottom Layer w20: U11.1 3964,3745 3965.97,3746.97 R17.2
NetR18_2: R18.2 U12.1 | length 100.8
  Bottom Layer w20: U12.1 3564,3750 3565.97,3751.97 R18.2
NetR19_1: R19.1 U7.3 | length 945.4
  Bottom Layer w20: R19.1 5434.06,2972 5435,2972.94 U7.3
NetR20_1: R20.1 U8.3 | length 92.5
  Bottom Layer w20: R20.1 4986,3451.03 4992.03,3445 U8.3
NetR21_1: R21.1 U9.3 | length 950.4
  Bottom Layer w20: U9.3 4625,2984.53 R21.1
NetR22_1: R22.1 U10.3 | length 100.8
  Bottom Layer w20: R22.1 4170,3431.03 4183.97,3445 U10.3
NetR23_1: R23.1 U11.3 | length 961.2
  Bottom Layer w20: U11.3 3854.06,3405.94 R23.1
NetR24_1: R24.1 U12.3 | length 88.7
  Bottom Layer w20: R24.1 3368,3441.03 3376.97,3450 U12.3
NetR25_2: R25.2 U13.1 | length 115.8
  Bottom Layer w20: U13.1 3166,3750 3167.97,3751.97 R25.2
NetR26_2: R26.2 U14.1 | length 96.3
  Bottom Layer w20: U14.1 2760,3750 2763.03,3746.97 R26.2
NetR27_2: R27.2 U15.1 | length 101.3
  Bottom Layer w20: U15.1 2348,3755 2351.03,3751.97 R27.2
NetR28_2: R28.2 U16.1 | length 100.8
  Bottom Layer w20: U16.1 1949,3750 1950.97,3751.97 R28.2
NetR29_1: R29.1 U13.3 | length 978.4
  Bottom Layer w20: U13.3 3054.53,3405.47 R29.1
NetR30_1: R30.1 U14.3 | length 86.6
  Bottom Layer w20: R30.1 2570,3446.03 2573.97,3450 U14.3
NetR31_1: R31.1 U15.3 | length 999.7
  Bottom Layer w20: U15.3 2200,2890 2259.53,2830.47 R31.1
NetR32_1: R32.1 U16.3 | length 86.6
  Bottom Layer w20: R32.1 1755,3446.03 1758.97,3450 U16.3
VCC: C1.2 D1.2 P1.2 RELAY1.8 RELAY2.8 RELAY3.8 RELAY4.8 RELAY5.8 RELAY6.8 RELAY7.8 RELAY8.8 RELAY9.8 RELAY10.8 RELAY11.8 RELAY12.8 RELAY13.8 RELAY14.8 RELAY15.8 RELAY16.8 U1.4 U2.4 U3.4 U4.4 U5.4 U6.4 U7.4 U8.4 U9.4 U10.4 U11.4 U12.4 U13.4 U14.4 U15.4 U16.4 | length 20568.2
  Top Layer w30: RELAY16.8 2120,3170 2120,3365 2035,3450 U16.4 1900,3552.43 1917.57,3570 2300,3570 ; U15.4 2300,3570 ; RELAY14.8 2945,3202.14 2945,3350 2845,3450 U14.4 2715,3565 2720,3570 ; U13.4 3110,3560 3120,3570 ; RELAY12.8 3725,3189.29 3725,3385 3660,3450 U12.4 3515,3550 3535,3570 ; U11.4 3910,3450 3910,3570 ; RELAY10.8 4510,3181.43 4510,3375 4440,3445 U10.4 4325,3570 ; U9.4 4725,3565 4720,3570 ; RELAY8.8 5335,3213.57 5335,3365 5255,3445 U8.4 5135,3570 ; U7.4 5544.57,3454.57 5544.57,3487.14 5545,3487.57 5545,3570 ; RELAY6.8 6100,3185.71 6100,3380 6035,3445 U6.4 5945,3570 ; U5.4 6345,3565 6350,3570 ; RELAY4.8 6895,3187.86 6895,3400 6850,3445 U4.4 6755,3565 6760,3570 ; U3.4 7155,3570 ; RELAY2.8 7685,3185 7685,3400 7640,3445 U2.4 7565,3570 ; RELAY1.8 8110,2105 8170,2165 D1.2 8165,2300 8165,2730 ; P1.2 8110,2675 8165,2730 ; 2300,3570 2720,3570 ; 2720,3570 3120,3570 ; 3120,3570 3535,3570 ; 3535,3570 3910,3570 ; 3910,3570 4325,3570 ; 4325,3570 4720,3570 ; 4720,3570 5135,3570 ; 5135,3570 5545,3570 ; 5545,3570 5945,3570 ; 5945,3570 6350,3570 ; 6350,3570 6760,3570 ; 6760,3570 7155,3570 ; 7155,3570 7565,3570 ; 7565,3570 7940,3570 7965,3545 U1.4 8140,3445 8165,3420 C1.2 8165,2730
  Bottom Layer w30: RELAY15.8 2445,2025 2510,1960 3235,1960 ; RELAY13.8 3237.86,1962.86 3235,1960 ; RELAY11.8 4030.71,1964.29 4035,1960 ; RELAY9.8 4823.57,1961.43 4825,1960 ; RELAY7.8 5616.43,1963.57 5620,1960 ; RELAY5.8 6409.29,1964.29 6405,1960 ; RELAY3.8 7202.14,1962.14 7200,1960 ; RELAY1.8 7995,2045 7910,1960 7200,1960 ; 3235,1960 4035,1960 ; 4035,1960 4825,1960 ; 4825,1960 5620,1960 ; 5620,1960 6405,1960 ; 6405,1960 7200,1960
pads on no net: RELAY1.5 RELAY1.6 RELAY1.7 RELAY2.5 RELAY2.6 RELAY2.7 RELAY3.5 RELAY3.6 RELAY3.7 RELAY4.5 RELAY4.6 RELAY4.7 RELAY5.5 RELAY5.6 RELAY5.7 RELAY6.5 RELAY6.6 RELAY6.7 RELAY7.5 RELAY7.6 RELAY7.7 RELAY8.5 RELAY8.6 RELAY8.7 RELAY9.5 RELAY9.6 RELAY9.7 RELAY10.5 RELAY10.6 RELAY10.7 RELAY11.5 RELAY11.6 RELAY11.7 RELAY12.5 RELAY12.6 RELAY12.7 RELAY13.5 RELAY13.6 RELAY13.7 RELAY14.5 RELAY14.6 RELAY14.7 RELAY15.5 RELAY15.6 RELAY15.7 RELAY16.5 RELAY16.6 RELAY16.7

## Keep-outs
Keep-Out Layer:
  lines w10: 1574.8,885 8267.72,885 ; 1574.8,887.28 1574.8,4155 8267.72,4155 8267.72,887.28